# Altium PCB Copy of PCB1.PcbDoc
Units mm, origin at the board's own origin, x right, y up, seen from the top; angles counter-clockwise.
Board outline 152.4 x 101.6 mm, 2 copper layers (Top Layer, Bottom Layer); 7 components, 8 nets, 49 pads, 0 vias.
Unrouted connection lines stored in the file: 11.
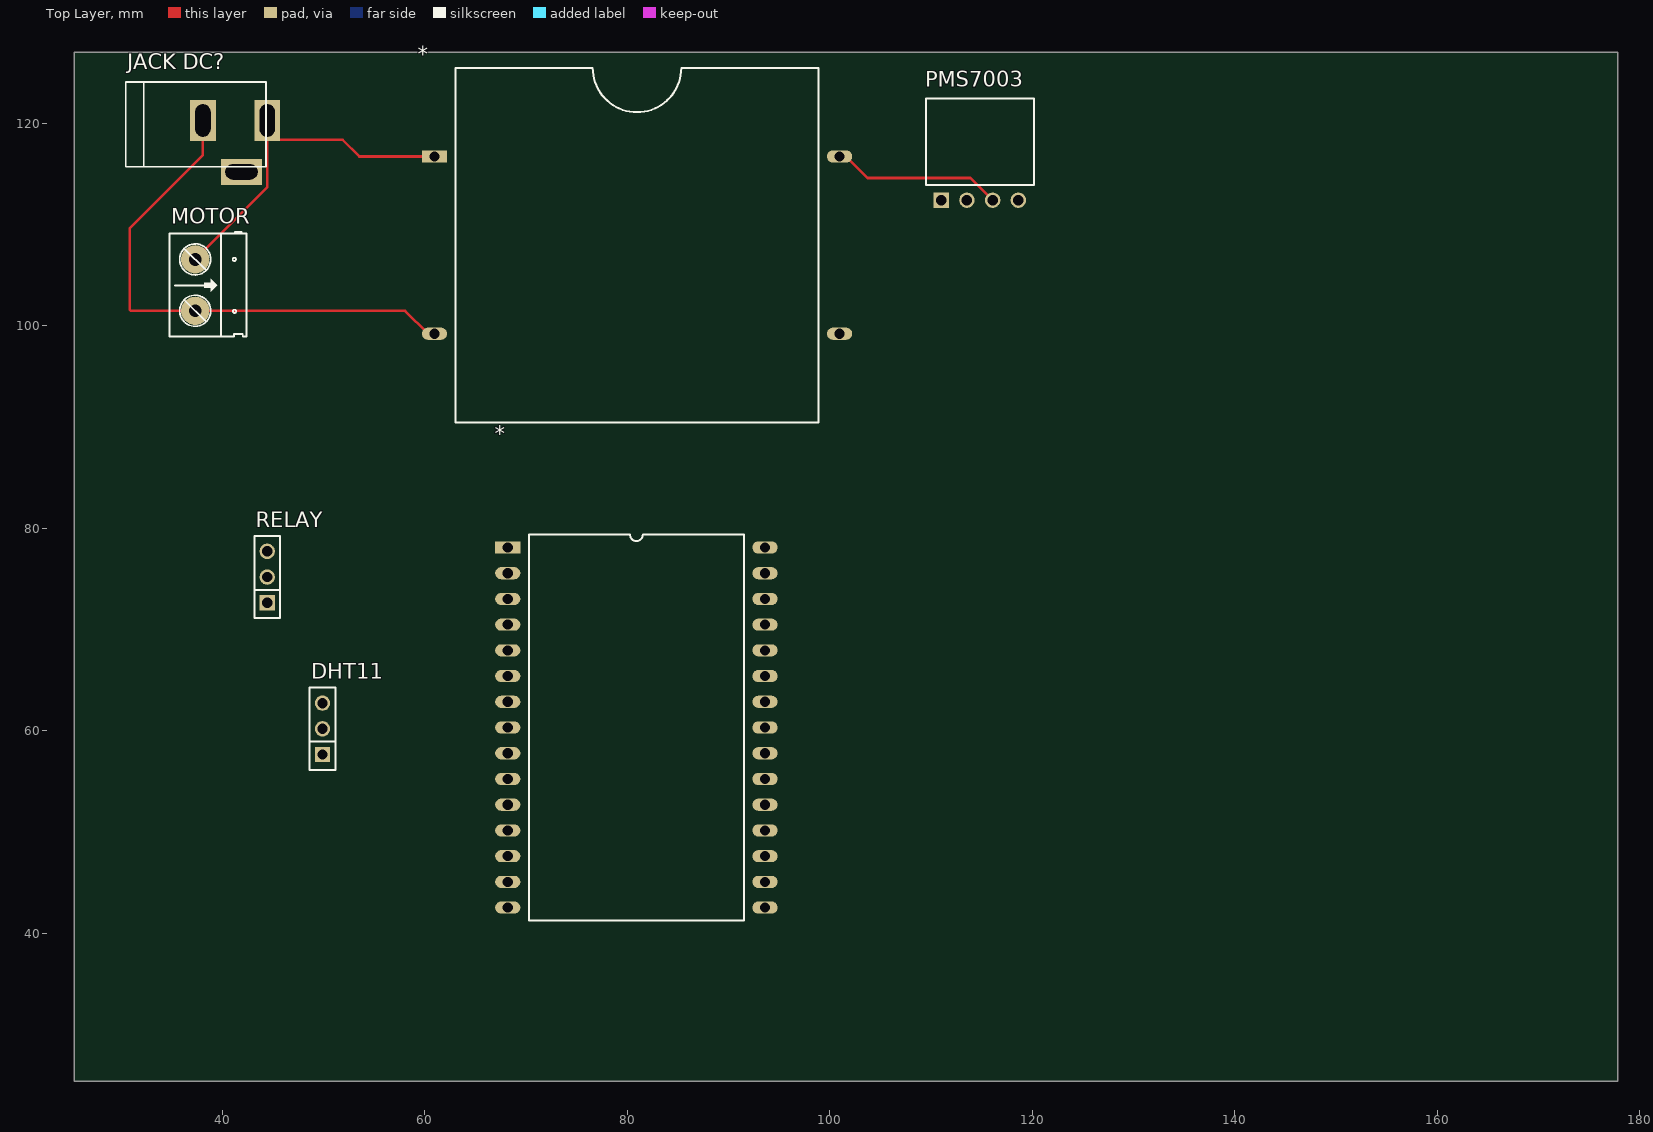
[diagram p0: Top Layer view]
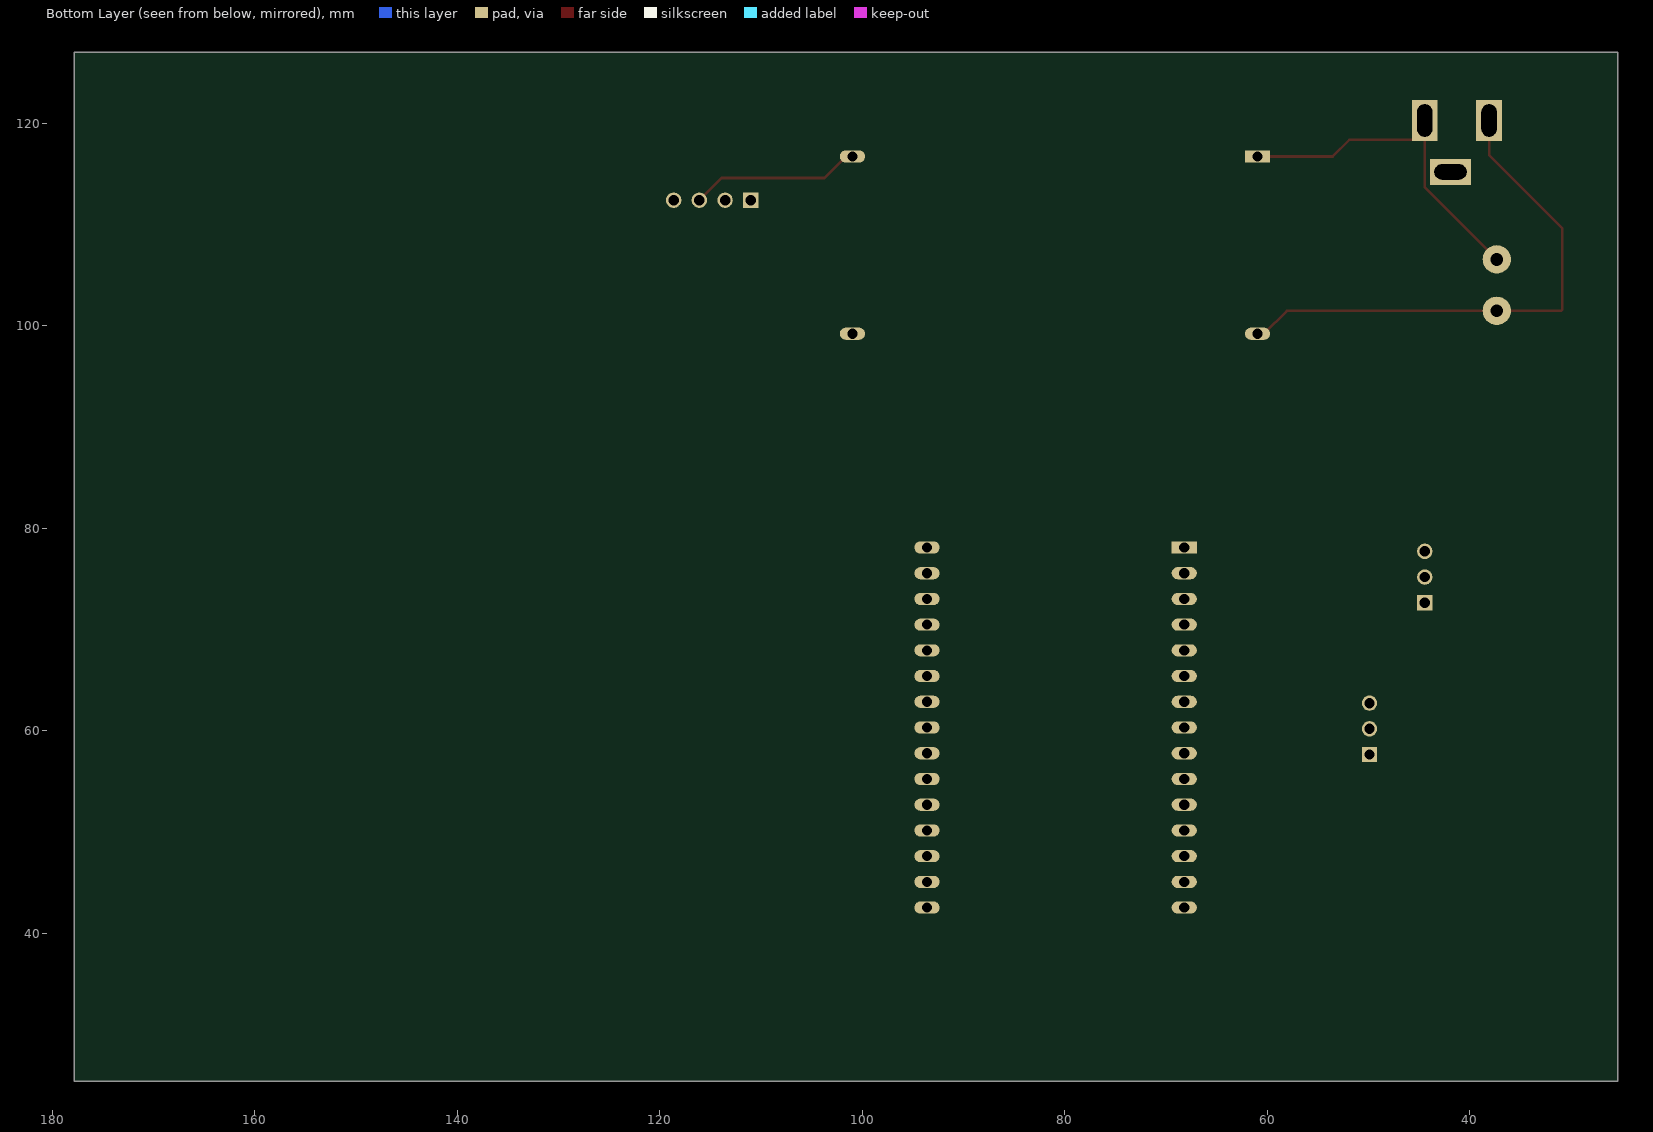
[diagram p1: Bottom Layer view, seen from below]

## Layer stack, top to bottom
Top Solder: solder mask 0.0102, Solder Resist, Dk 3.5
Top Layer: signal copper 0.0356
Dielectric 1: dielectric 0.32, FR-4, Dk 4.8
Bottom Layer: signal copper 0.0356
Bottom Solder: solder mask 0.0102, Solder Resist, Dk 3.5

## Board outline
25.4,25.4 177.8,25.4 177.8,127 25.4,127

## Design rules (kind name [scope] priority, off if disabled: settings)
Clearance [All] p1: gap=0.254 ignorepadtopadclearanceinfootprint=FALSE except(0: Arc-Hole Track-Hole SMDPad-Hole THPad-Hole Via-Hole Fill-Hole Poly-Hole Region-Hole Text-Hole)
PolygonConnect [All] p1: connectstyle=Relief reliefconductorwidth=0.254 reliefentries=4 polygonreliefangle="90 Angle" airgapwidth=0.254
RoomDefinition BAO_CHAY_SCHEMATIC [InComponentClass('BAO_CHAY_SCHEMATIC')] p1: confinementstyle=ConfineIn formatcopy=TRUE lockcomponents=FALSE outline 178.943,26.924 296.418,26.924 296.418,80.264 178.943,80.264
RoutingVias [All] p1: holewidth=0.711 width=1.27 viastyle="Through Hole" minholewidth=0.711 minwidth=1.27 maxholewidth=0.711 maxwidth=1.27
SolderMaskExpansion [All] p1: expansion=0.102 istentingtop=FALSE
Width [All] p1: maxlimit=0.254 minlimit=0.254 preferedwidth=0.254
30 further rules are at their usual default settings.

## Classes and differential pairs
component class BAO_CHAY_SCHEMATIC: * DHT11 "JACK DC?" MOTOR PMS7003 RELAY

## Components (designator, comment, footprint, x,y, rotation, side; value= is the part's Value field where it differs from the comment)
* "ESP32" ESP32 68.199,78.105 r0 top
* "BUCK_LM2596" DIP4 60.965,116.713 r0 top
DHT11 "DHT11" "JP 1x3 CT" 49.911,57.658 r90 top
"JACK DC?" "JACK DC 5.5" "JACK DC 5.5" 41.275,117.729 r0 top value="Jac DC"
MOTOR "MOTOR" "Con 2 KF301 5.08" 37.338,106.553 r270 top
PMS7003 "PMS7003" "JP 1x4 CC" 114.808,112.395 r0 top
RELAY "RELAY" "JP 1x3 CT" 44.45,72.644 r90 top

## Footprints (in the part's own frame and the unit in brackets; to place one, negate y for a bottom-side part, rotate by r counter-clockwise, add the part's x,y. Pads: shape width x height; smd on the part's side, far side on the other; paste and mask are expansions set on the pad)
"Con 2 KF301 5.08" [mil]
  round 110 hole 50: 1(0,0) 2(200,0)
  silkscreen extent -106,-100 300,200, body extent -45,-97 255,190, height 335
DIP4 [mm]
  rect 2.5x1.2 hole 1: 1(0,0)
  oval 2.5x1.2 hole 1: 2(0,-17.5) 3(40,-17.5) 4(40,0)
  silkscreen extent 2.08,-26.25 37.91,8.75, body extent -1.91,-18.8 41.59,2.8, height 11.5
ESP32 [mm]
  rect 2.5x1.2 hole 1: 1(0,0)
  oval 2.5x1.2 hole 1: 2(0,-2.54) 3(0,-5.08) 4(0,-7.62) 5(0,-10.16) 6(0,-12.7) 7(0,-15.24) 8(0,-17.78) 9(0,-20.32) 10(0,-22.86) 11(0,-25.4) 12(0,-27.94) 13(0,-30.48) 14(0,-33.02) 15(0,-35.56) 16(25.4,-35.56) 17(25.4,-33.02) 18(25.4,-30.48) 19(25.4,-27.94) 20(25.4,-25.4) 21(25.4,-22.86) 22(25.4,-20.32) 23(25.4,-17.78) 24(25.4,-15.24) 25(25.4,-12.7) 26(25.4,-10.16) 27(25.4,-7.62) 28(25.4,-5.08) 29(25.4,-2.54) 30(25.4,0)
  silkscreen extent 2.08,-36.83 23.32,1.27, body extent -1.52,-40.96 26.98,9.97, height 10.2
"JACK DC 5.5" [mm] "Jac DC input"
  rect 2.54x4.064 hole 1.5 slot 3.2 at 90 deg: 1(3.175,2.54) 2(-3.175,2.54)
  rect 4.064x2.54 hole 1.5 slot 3.2 at 0 deg: 3(0.635,-2.54)
  silkscreen extent -10.79,-2.03 3.05,6.35, body extent -10.42,-2.67 3.4,6.84, height 11.02
"JP 1x3 CT" [mm]
  rect 1.52x1.52 hole 1.02: 1(0,0)
  round 1.52 hole 1.02: 2(2.54,0) 3(5.08,0)
  silkscreen extent -1.52,-1.27 6.6,1.27, body extent -1.52,-1.25 6.6,1.25, height 8.51
"JP 1x4 CC" [mm]
  rect 1.52x1.52 hole 1.02: 1(-3.81,0)
  round 1.52 hole 1.02: 2(-1.27,0) 3(1.27,0) 4(3.81,0)
  silkscreen extent -5.33,1.52 5.33,10.03, body extent -5.33,-0.25 5.33,10.05, height 2.51

## Part data
DHT11 RELAY: library part "JP 1x3 2.54 Cai Thang", "Cắm", Chung_Loai=Cắm, Don_Vi=Con, Ma_Hang=MH004006, Ten_Linh_Kien="Jump Đơn Cái 2.54MM 1x20P Thẳng"
MOTOR: library part "CON 2 KF301", "Cắm", Chung_Loai=Cắm, Don_Vi=Con, Ma_Hang=MH000987, Ten_Linh_Kien="CON 2 KF301-2P 5.08MM Xanh Dương"
PMS7003: library part "JP 1x4 2.54 Cai Cong", "Cắm", Chung_Loai=Cắm, Don_Vi=Con, Ma_Hang=MH001265, Ten_Linh_Kien="Jump Đơn Cái 2.54MM 1x40P Cong"

## Nets (pads, with @x,y where several pads share a name; then routed paths per layer and width w, separated by ;. In a path a pad name is that pad's centre, name@x,y a point inside that pad or via, vN(x,y) a via of type N, cw(c..) or ccw(c..) an arc to the next point about the centre after c; other vN are vias at no path point)
Net*_1: "JACK DC?.1" *.1@60.965,116.713 MOTOR.1 | length 34.3
  Top Layer w0.254: MOTOR.1 44.45,113.665 44.45,119.507 ; 44.45,120.269 44.45,119.507 ; *.1@60.965,116.713 53.543,116.713 51.892,118.364 45.593,118.364 44.45,119.507
Net*_2: "JACK DC?.2" *.2@60.965,99.213 MOTOR.2 | length 52.7
  Top Layer w0.254: 38.1,120.269 38.1,116.84 30.861,109.601 30.861,101.622 31.01,101.473 MOTOR.2 58.055,101.473 60.315,99.213 *.2@60.965,99.213
Net*_3: *.3@100.965,99.213 *.29 DHT11.1 PMS7003.4 RELAY.3
Net*_4: *.4@100.965,116.713 *.30 DHT11.3 PMS7003.3 RELAY.2 | length 16.9
  Top Layer w0.254: *.4@100.965,116.713 101.615,116.713 103.743,114.585 113.888,114.585 PMS7003.3
Net*_5: *.5 DHT11.2
Net*_8: *.8 RELAY.1
Net*_14: *.14 PMS7003.2
Net*_15: *.15 PMS7003.1
pads on no net: "JACK DC?.3" *.1@68.199,78.105 *.2@68.199,75.565 *.3@68.199,73.025 *.4@68.199,70.485 *.6 *.7 *.9 *.10 *.11 *.12 *.13 *.16 *.17 *.18 *.19 *.20 *.21 *.22 *.23 *.24 *.25 *.26 *.27 *.28